# EAGLE board 2x35 Amplifier With (EAGLE 7.5.0)
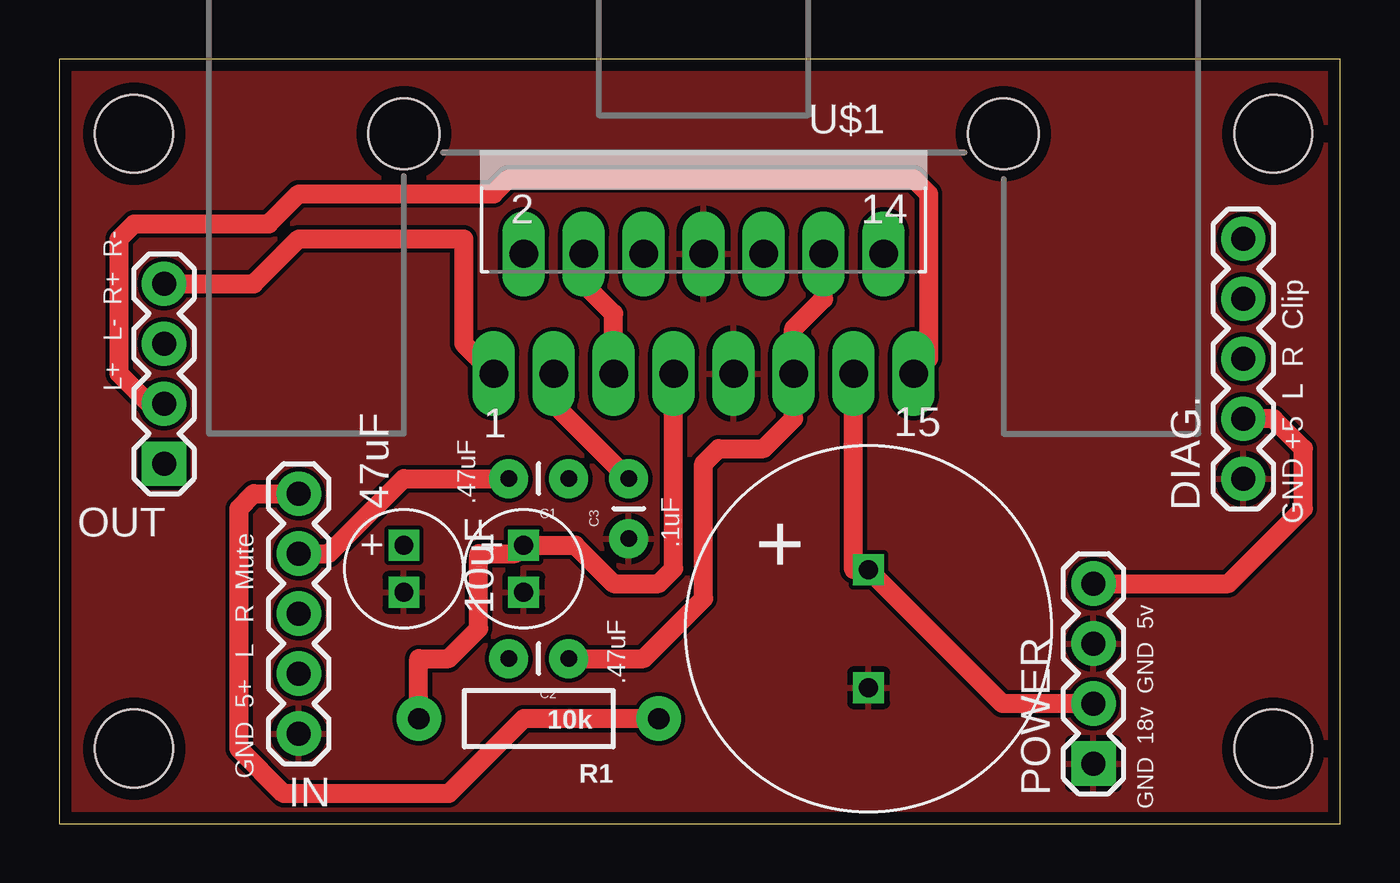
[diagram p0: board, top side]
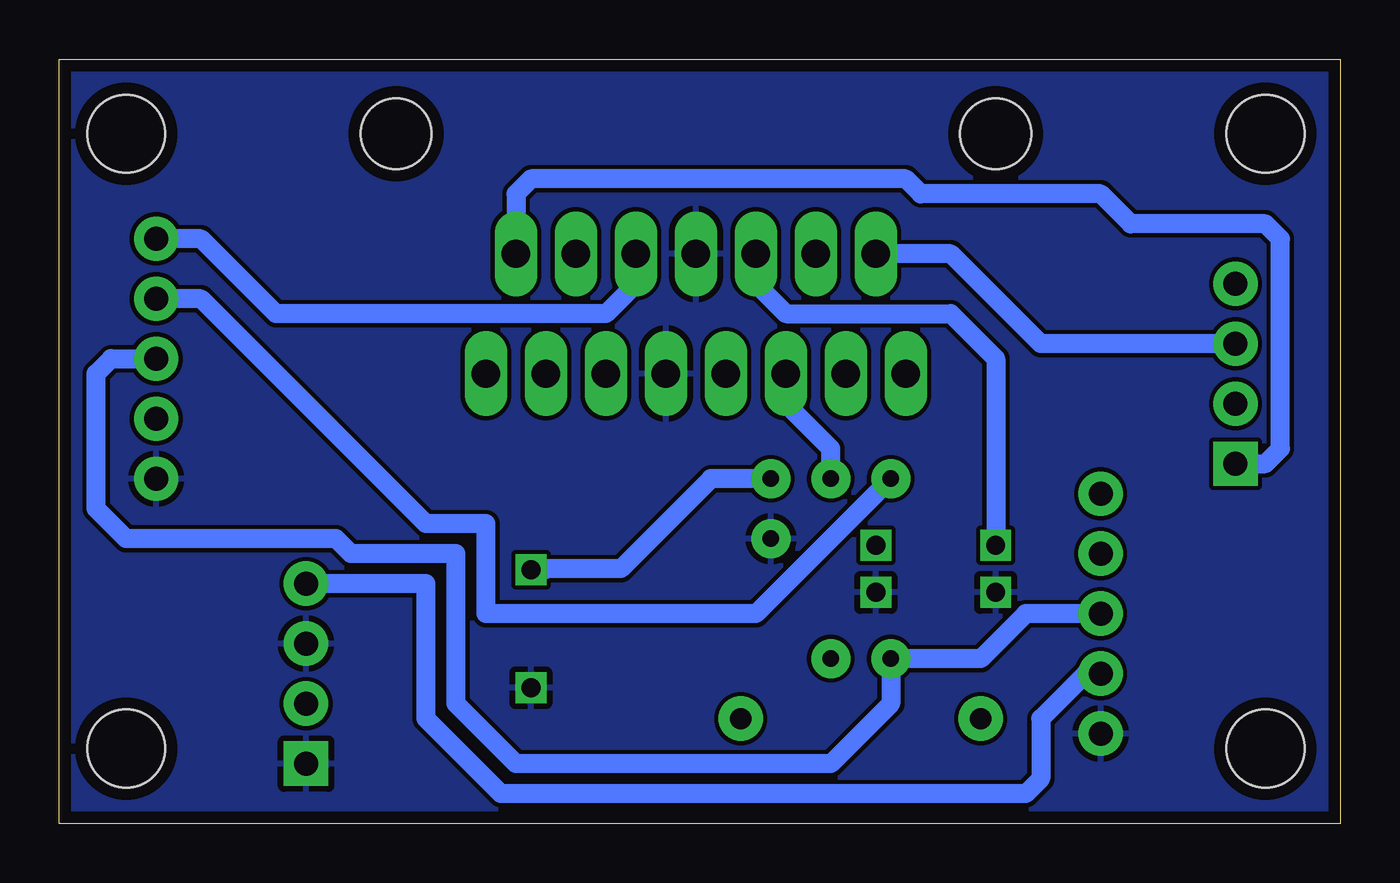
[diagram p1: board, bottom side, seen from below]

Size 54.28 x 32.38 mm. Coordinates in mm from the lower left corner, seen from the top.
Outline: 0,0 54.28,0 54.28,32.38 0,32.38 0,0
Copper layers (1*16): Top 0.035mm / dielectric 1.5mm / Bottom 0.035mm
Design rules "default *": minimum track width 10mil, minimum drill 24mil, track to track 7mil, track to pad 7mil, pad to pad 8mil, via to via 8mil, smd to smd 8mil, copper to edge 20mil, drill to drill 8mil, minimum pad ring 10mil, minimum via ring 8mil, stop-mask expansion 4mil, vias tented up to drill 0mil, thermal gap 10mil

## Footprints (pad centres in the part's own frame; a part is rotated, then mirrored left to right if it is on the bottom)
2MMLEAD_5MMDIAMETER = drill 0.8 square: + 1,0; - -1,0
5MMLEAD_12.5MMDIAMETER = drill 0.8 square: + 2.5,0; - -2.5,0
CAP-PTH-SMALL = drill 0.7 pad 1.651: 1 0,0; 2 2.54,0
1X05 = drill 1.016 pad 1.88: 1 0,0; 2 2.54,0; 3 5.08,0; 4 7.62,0; 5 10.16,0
1X04 = drill 1.016 pad 1.88 square: 1 0,0 | drill 1.016 pad 1.88: 2 2.54,0; 3 5.08,0; 4 7.62,0
AXIAL-0.4 = drill 0.9 pad 1.88: P$1 -5.08,0; P$2 5.08,0
MULTIWATT-15 = drill 1.2 long: 1 -8.89,-7.62; 2 -7.62,-2.54; 3 -6.35,-7.62; 4 -5.08,-2.54; 5 -3.81,-7.62; 6 -2.54,-2.54; 7 -1.27,-7.62; 8 0,-2.54; 9 1.27,-7.62; 10 2.54,-2.54; 11 3.81,-7.62; 12 5.08,-2.54; 13 6.35,-7.62; 14 7.62,-2.54; 15 8.89,-7.62
6400BG_HEATSINK = hole 2.997: -12.7,0; 12.7,0
STAND-OFF = hole 3.302: 0,0

## Placement (x,y rotation side)
10UF  5MM-12.5MM-POLAR2MMX5MM  [2MMLEAD_5MMDIAMETER]  19.68,10.79 90 top
47UF  5MM-12.5MM-POLAR2MMX5MM  [2MMLEAD_5MMDIAMETER]  14.61,10.79 90 top
1000UF  5MM-12.5MM-POLAR5MMX12.5MM  [5MMLEAD_12.5MMDIAMETER]  34.29,8.26 90 top
C1  .47uF  [CAP-PTH-SMALL]  21.59,14.61 180 top
C2  .47uF  [CAP-PTH-SMALL]  21.59,6.99 180 top
C3  .1uF  [CAP-PTH-SMALL]  24.13,12.06 90 top
DIAG.  [1X05]  50.16,14.61 90 top
IN  [1X05]  10.16,3.81 90 top
OUT  [1X04]  4.45,15.24 90 top
POWER  [1X04]  43.81,2.54 90 top
R1  10k  [AXIAL-0.4]  20.32,4.45 180 top
U$1  TDA7375V  [MULTIWATT-15]  27.3,26.67 0 top
U$2  6400BG_HEATSINK  [6400BG_HEATSINK]  27.3,29.21 0 top
U$3  [STAND-OFF]  3.17,29.21 0 top
U$4  [STAND-OFF]  51.44,29.21 0 top
U$5  [STAND-OFF]  3.17,3.17 0 top
U$6  [STAND-OFF]  51.44,3.17 0 top

## Library data of the parts
10UF 47UF 1000UF U$1 = AMP Library
C1-C3 R1 = SparkFun-Passives
DIAG. IN OUT POWER = SparkFun-Connectors
U$2-U$6 = SparkFun-Electromechanical

## Nets
+5V: DIAG..2 IN.2 POWER.4
CLIP: DIAG..5 U$1.10
GND: 10UF.- 47UF.- 1000UF.- C3.1 DIAG..1 IN.1 POWER.1 POWER.3 U$1.8 U$1.9
IN1: C1.1 U$1.4 U$1.5
IN3: C2.1 U$1.11 U$1.12
N$1: 10UF.+ R1.P$2 U$1.7
N$2: 47UF.+ U$1.6
OUT1: OUT.4 U$1.1
OUT2: OUT.3 U$1.2
OUT3: OUT.2 U$1.15
OUT4: OUT.1 U$1.14
RAW_IN1: C1.2 DIAG..4 IN.4
RAW_IN3: C2.2 DIAG..3 IN.3
ST-BY: IN.5 R1.P$1
VCC: 1000UF.+ C3.2 POWER.2 U$1.3 U$1.13

## Tracks (layer width: path | path; a pad name or v marks a point on that pad's centre or on a via)
+5V
  Top 0.813: POWER.4 49.53,10.16 52.7,13.34 52.7,15.88 51.44,17.14 DIAG..2
  Bottom 0.813: IN.2 10.79,6.35 12.7,4.45 12.7,1.91 13.34,1.27 35.56,1.27 38.73,4.45 38.73,10.16 POWER.4
CLIP
  Bottom 0.813: U$1.10 29.84,22.86 31.11,21.59 45.09,21.59 48.26,24.77 DIAG..5
GND
  pour Bottom: 0,0 0,32.38 54.61,32.38 54.61,0
  pour Top: 0,32.38 54.61,32.38 54.61,0 0,0
IN1
  Top 0.813: U$1.5 23.5,21.59 22.23,22.86 U$1.4
  Bottom 0.813: C1.1 21.59,15.88 23.5,17.78 U$1.5
IN3
  Top 0.813: U$1.12 32.38,22.23 31.11,20.95 U$1.11 31.11,17.14 29.84,15.88 27.94,15.88 27.3,15.24 27.3,9.53 24.77,6.99 C2.1
N$1
  Top 0.813: R1.P$2 15.24,6.99 16.51,6.99 17.78,8.26 17.78,11.43 19.32,11.43 10UF.+ 21.86,11.79 23.5,10.16 25.4,10.16 26.04,10.79 U$1.7
N$2
  Bottom 0.813: U$1.6 24.77,22.86 23.5,21.59 16.51,21.59 14.61,19.68 47UF.+
OUT1
  Top 0.813: OUT.4 8.26,22.86 10.16,24.77 17.14,24.77 17.14,20.32 U$1.1
OUT2
  Bottom 0.813: OUT.3 12.7,20.32 16.51,24.13 U$1.2
OUT3
  Top 0.813: OUT.2 3.81,17.78 2.54,19.05 2.54,24.77 3.17,25.4 8.89,25.4 10.16,26.67 18.41,26.67 19.05,27.3 36.2,27.3 36.83,26.67 36.83,19.68 U$1.15
OUT4
  Bottom 0.813: OUT.1 3.17,15.24 2.54,15.88 2.54,24.77 3.17,25.4 8.89,25.4 10.16,26.67 17.78,26.67 18.41,27.3 34.29,27.3 34.92,26.67 U$1.14
RAW_IN1
  Top 0.813: IN.4 11.43,11.43 14.61,14.61 C1.2
  Bottom 0.813: C1.2 24.77,8.89 36.2,8.89 36.2,12.7 38.73,12.7 48.26,22.23 DIAG..4
RAW_IN3
  Bottom 0.813: DIAG..3 52.07,19.68 52.7,19.05 52.7,13.34 51.44,12.06 42.55,12.06 41.91,11.43 37.47,11.43 37.47,5.08 34.92,2.54 21.59,2.54 19.05,5.08 C2.2 15.24,6.99 13.34,8.89 IN.3
ST-BY
  Top 0.813: R1.P$1 19.68,4.45 16.51,1.27 9.53,1.27 7.62,3.17 7.62,13.34 8.26,13.97 IN.5
VCC
  Top 0.813: U$1.13 33.66,10.76 1000UF.+ 39.97,5.08 POWER.2 | C3.2 20.95,17.78 U$1.3
  Bottom 0.813: C3.2 26.67,14.61 30.48,10.79 33.62,10.79 33.66,10.76 1000UF.+

## Text on the board
tNames: L+ L- R+ R- | 47uF | GND +5 L R Clip | 10uF | GND 5+ L R Mute | GND 18v GND 5v